# Altium PCB board2.PcbDoc
Units mm, origin at the board's own origin, x right, y up, seen from the top; angles counter-clockwise.
Board outline 14 x 33 mm, 2 copper layers (Component Side, Bottom Layer), stack 0.325 mm thick; 33 components, 30 nets, 186 pads, 59 vias.
Unrouted connection lines stored in the file: 11.
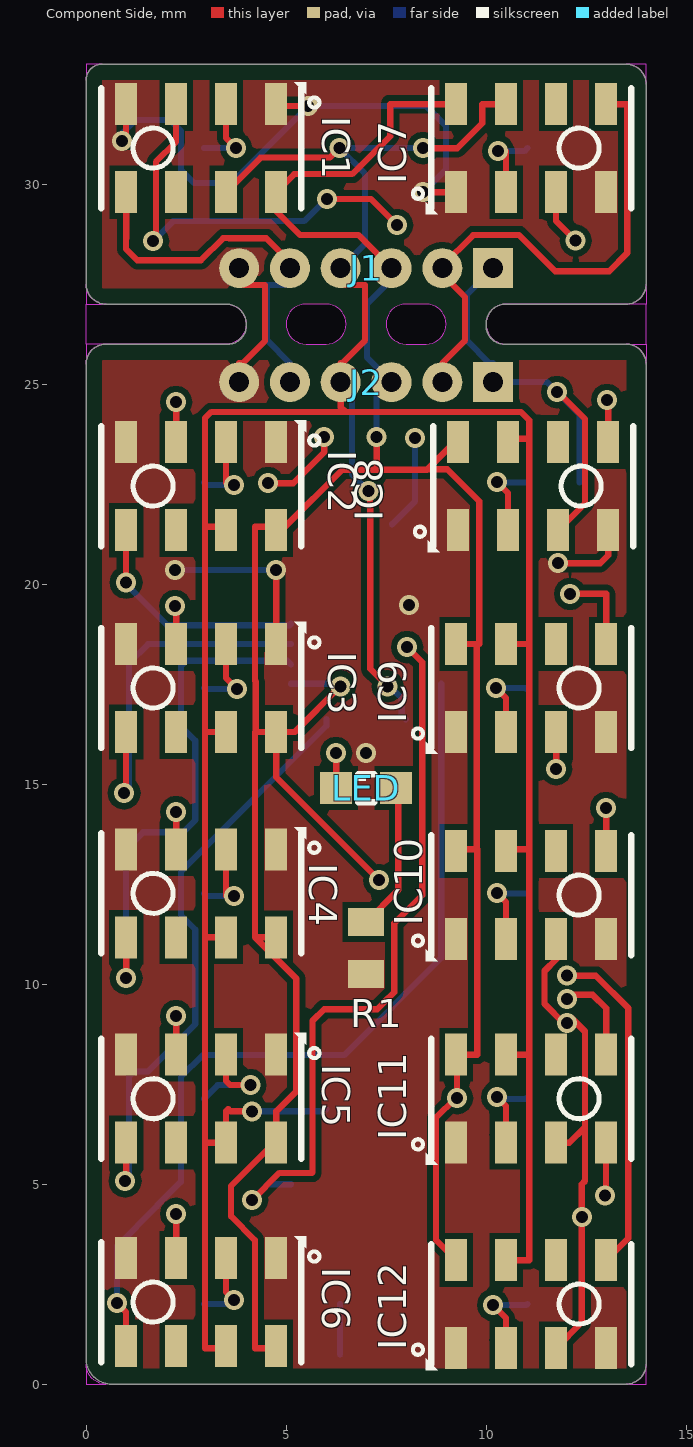
[diagram p0: Component Side view]
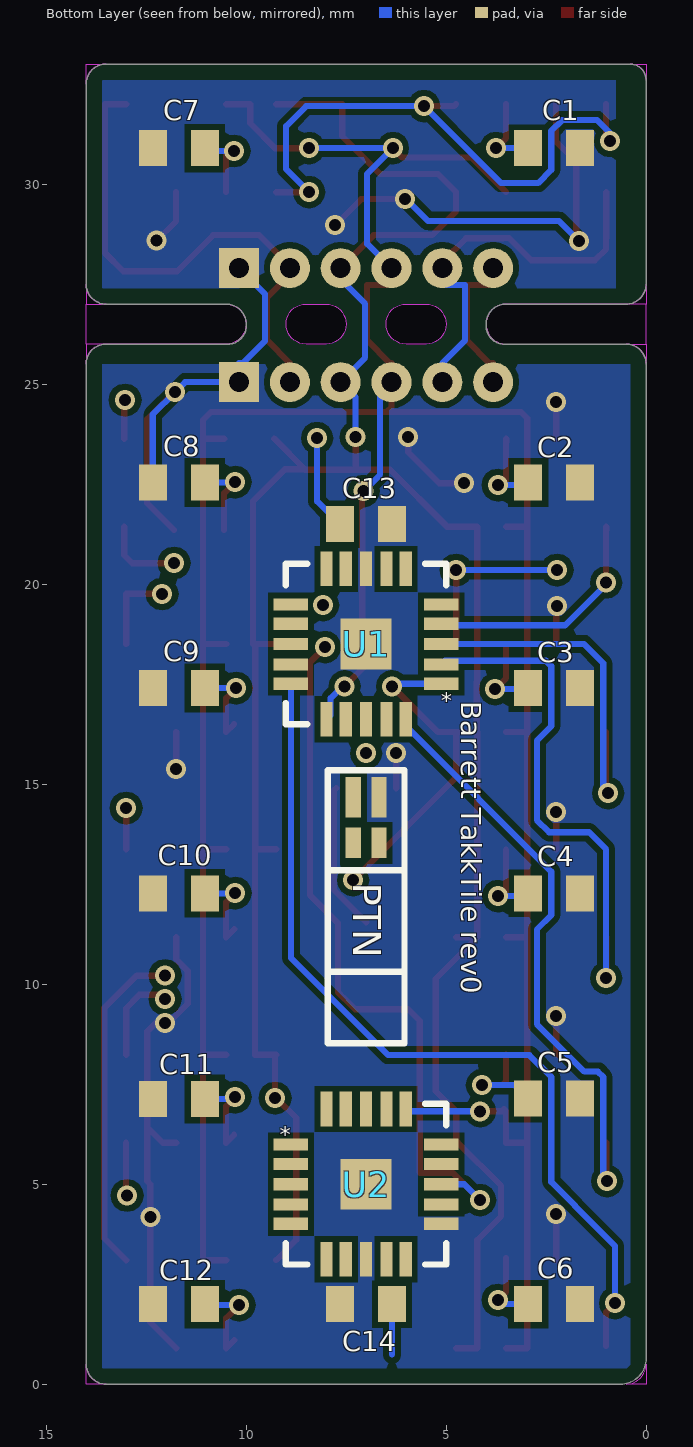
[diagram p1: Bottom Layer view, seen from below]

## Layer stack, top to bottom
Top Solder: solder mask 0.0102, Solder Resist, Dk 3.5
Component Side: signal copper 0.0356
Dielectric 1: core 0.254, FR-4, Dk 4.2
Bottom Layer: signal copper 0.0356
Solder Side: solder mask 0.0102, Solder Resist, Dk 3.5

## Board outline
0,0.637 0,25.5 cw(c0.5,25.5) 0.5,26 3.55,26 ccw(c3.55,26.45) 4,26.45 4,26.5 ccw(c3.5,26.5) 3.5,27 0.5,27 cw(c0.5,27.5) 0,27.5 0,32.6 cw(c0.4,32.6) 0.4,33 13.5,33 cw(c13.5,32.5) 14,32.5 14,27.5 cw(c13.5,27.5) 13.5,27 10.5,27 ccw(c10.5,26.5) 10,26.5 10,26.45 ccw(c10.45,26.45) 10.45,26 13.5,26 cw(c13.5,25.5) 14,25.5 14,0.5 cw(c13.5,0.5) 13.5,0 0.637,0 cw(c0.637,0.637)
cut-out: 14,27 10.5,27 ccw(c10.5,26.5) 10,26.5 ccw(c10.5,26.5) 10.5,26 14,26
cut-out: 0,27 3.5,27 cw(c3.5,26.5) 4,26.5 cw(c3.5,26.5) 3.5,26 0,26
cut-out: 8,27 ccw(c8,26.5) 7.5,26.5 ccw(c8,26.5) 8,26 8.5,26 ccw(c8.5,26.5) 9,26.5 ccw(c8.5,26.5) 8.5,27
cut-out: 5.5,27 ccw(c5.5,26.5) 5,26.5 ccw(c5.5,26.5) 5.5,26 6,26 ccw(c6,26.5) 6.5,26.5 ccw(c6,26.5) 6,27
cut-out: 0,0 0.5,0 cw(c0.5,0.5) 0,0.5
cut-out: 14,0 14,0.5 cw(c13.5,0.5) 13.5,0
cut-out: 14,25.5 ccw(c13.5,25.5) 13.5,26 14,26
cut-out: 13.5,27 ccw(c13.5,27.5) 14,27.5 14,27
cut-out: 13.5,33 cw(c13.5,32.5) 14,32.5 14,33
cut-out: 0,33 0,32.6 cw(c0.4,32.6) 0.4,33
cut-out: 0,27 0.5,27 cw(c0.5,27.5) 0,27.5
cut-out: 0,25.5 cw(c0.5,25.5) 0.5,26 0,26

## Design rules (kind name [scope] priority, off if disabled: settings)
BoardOutlineClearance [All] p1: gap=0.35 except(0.2: Text-OutlineEdge Text-CutoutEdge Text-CavityEdge Text-SplitBarrior Text-SplitContinuation; 0.4: Track-OutlineEdge Track-CutoutEdge Track-CavityEdge Track-SplitBarrior Track-SplitContinuation)
Clearance 0.127 [All] p1: gap=0.153
Clearance "Clearance (Same Net)" [All] p2: gap=0 except(0.127: SMDPad-SMDPad SMDPad-THPad; 0.152: SMDPad-Via)
ComponentClearance [All] p1: gap=0.127 collisioncheckmode=3 verticalgap=0.127 showdistances=FALSE
HoleSize [All] p1: absolutevalues=TRUE maxlimit=2.54 minlimit=0.254 maxpercent=80.000 minpercent=20.000
HoleToHoleClearance mdViaViaSameLayer [All] p1: gap=0.203 allowstackedmicrovias=TRUE
HoleToHoleClearance [All] p2: gap=0.254 allowstackedmicrovias=TRUE
MinimumSolderMaskSliver [All] p1: minsoldermaskwidth=0.025
PasteMaskExpansion mlMinCreamFrame [All] p1: expansion=0
PasteMaskExpansion [All] p2: expansion=0
PlaneConnect [All] p1: planeconnectstyle=Direct reliefexpansion=0.508 reliefentries=4 reliefconductorwidth=0.254 reliefairgap=0.254
PolygonConnect ThermalVias [IsVia] p1: connectstyle=Direct reliefconductorwidth=0.254 reliefentries=4 polygonreliefangle="90 Angle" airgapwidth=0.254
PolygonConnect [All] p2: connectstyle=Direct reliefconductorwidth=0.254 reliefentries=4 polygonreliefangle="90 Angle" airgapwidth=0.254
RoutingVias [All] p1: holewidth=0.3 width=0.5 viastyle="Through Hole" minholewidth=0.3 minwidth=0.5 maxholewidth=0.3 maxwidth=0.5
SilkToSilkClearance [All] p1 off: silktosilkclearance=0.254
SilkToSolderMaskClearance [IsPad] p1 off: minsilkscreentomaskgap=0.254 clearancetoexposedcopper=TRUE
SolderMaskExpansion mlMinStopFrame [All] p1: expansion=0.051
SolderMaskExpansion [All] p2: expansion=0.102
Width Width_1 [All] p1: maxlimit=0.16 minlimit=0.153 preferedwidth=0.153
Width [All] p2: maxlimit=0.254 minlimit=0.254 preferedwidth=0.254
22 further rules are at their usual default settings.

## Classes and differential pairs
component class board: C1 C2 C3 C5 C6 C7 C8 C9 C10 C11 C12 C13 C14 IC1 IC2 IC3 IC4 IC5 IC6 IC7 IC9 IC10 IC11 IC12 J1 J2 LED PTN R1 U1

## Components (designator, comment, footprint, x,y, rotation, side; value= is the part's Value field where it differs from the comment)
C1 "1uF" C0402 2.3,30.9 r180 bottom
C2 "1uF" C0402 2.3,22.539 r180 bottom
C3 "1uF" C0402 2.3,17.404 r180 bottom
C4 "1uF" C0402 2.3,12.269 r180 bottom
C5 "1uF" C0402 2.3,7.135 r180 bottom
C6 "1uF" C0402 2.3,2 r180 bottom
C7 "1uF" C0402 11.683,30.9 r0 bottom
C8 "1uF" C0402 11.683,22.539 r0 bottom
C9 "1uF" C0402 11.683,17.404 r0 bottom
C10 "1uF" C0402 11.683,12.269 r0 bottom
C11 "1uF" C0402NOMECH 11.683,7.127 r0 bottom
C12 "1uF" C0402 11.683,2 r0 bottom
C13 "1uF" C0402 7,21.498 r180 bottom
C14 "1uF" C0402 7,2 r0 bottom
IC1 "MPL115A2" MPL115A2 1.675,30.9 r270 top
IC2 "MPL115A2" MPL115A2 1.675,22.45 r270 top
IC3 "MPL115A2" MPL115A2 1.675,17.404 r270 top
IC4 "MPL115A2" MPL115A2 1.675,12.269 r270 top
IC5 "MPL115A2" MPL115A2 1.675,7.135 r270 top
IC6 "MPL115A2" MPL115A2 1.675,2.05 r270 top
IC7 "MPL115A2" MPL115A2 12.325,30.9 r90 top
IC8 "MPL115A2" MPL115A2 12.375,22.45 r90 top
IC9 "MPL115A2" MPL115A2 12.325,17.404 r90 top
IC10 "MPL115A2" MPL115A2 12.325,12.225 r90 top
IC11 "MPL115A2" MPL115A2 12.325,7.135 r90 top
IC12 "MPL115A2" MPL115A2 12.325,2 r90 top
J1 "CON6THR127" CON6THR127NOSILK 7,27.9 r0 top
J2 "CON6THR127" CON6THR127NOSILK 7,25.05 r0 top
LED "LEDSML0603" SML0603 7,14.9 r0 top
PTN "PTN4H" PTN4H 7,14.1 r180 bottom
R1 "120R" R0402 7,10.9 r270 top
U1 "ATTINY24A-MU-QFN20" QFN50P400X400X80-21N 7,18.5 r0 bottom
U2 "ATTINY24A-MU-QFN20" QFN50P400X400X80-21N 7,4.998 r180 bottom

## Footprints (in the part's own frame and the unit in brackets; to place one, negate y for a bottom-side part, rotate by r counter-clockwise, add the part's x,y. Pads: shape width x height; smd on the part's side, far side on the other; paste and mask are expansions set on the pad)
C0402 [mm] "C0402"
  rect 0.7x0.9 smd: 1(-0.65,0) 2(0.65,0)
C0402NOMECH [mm] "C0402"
  rect 0.7x0.9 smd: 1(-0.65,0) 2(0.65,0)
CON6THR127NOSILK [mm] "Connector, Through Hole, 1.27mm"
  round 1 hole 0.5: 1(-3.175,0) 2(-1.905,0) 3(-0.635,0) 4(0.635,0) 5(1.905,0)
  rect 1x1 hole 0.5: 6(3.175,0)
MPL115A2 [mm] "MPL115A2"
  rect 1.05x0.55 smd: 1(-1.1,3.075) 2(-1.1,1.825) 3(-1.1,0.575) 4(-1.1,-0.675) 5(1.1,-0.675) 6(1.1,0.575) 7(1.1,1.825) 8(1.1,3.075)
  silkscreen extent -1.65,-1.3 1.5,4.16
PTN4H [mm]
  rect 0.38x1.02 smd: 0(-0.32,0.57) 1(0.32,0.57)
  rect 0.38x0.76 smd: 2(-0.32,-0.57) 3(0.32,-0.57)
  silkscreen extent -0.96,-5.58 0.96,1.25
QFN50P400X400X80-21N [mil] "QFN50P400X400X80-21N"
  rect 34x12 smd: 1(-74,39) 2(-74,20) 3(-74,0) 4(-74,-20) 5(-74,-39) 11(74,-39) 12(74,-20) 13(74,0) 14(74,20) 15(74,39)
  rect 12x34 smd: 6(-39,-74) 7(-20,-74) 8(0,-74) 9(20,-74) 10(39,-74) 16(39,74) 17(20,74) 18(0,74) 19(-20,74) 20(-39,74)
  rect 50x50 smd: 21(0,0)
  silkscreen extent -79,-79 79,79
R0402 [mm] "R0402"
  rect 0.7x0.9 smd: 1(-0.65,0) 2(0.65,0)
SML0603 [mil] "SML0603"
  rect 31.5x31.5 smd: A(29.53,0) C(-29.53,0)
  silkscreen extent -10,-14 8,16

## Part data
C1 C2 C3 C4 C5 C6 C7 C8 C9 C10 C11 C12 C13 C14: library part C-EUC0402, "CAPACITOR, European symbol"
LED: "LED   OSRAM: - CHIPLED LG R971, LG N971, LY N971, LG Q971, LY Q971, LO R971, LY R971 LH N974, LH R974 LS Q976, LO Q976, LY Q976 LO Q996 - Hyper CHIPLED LW Q18S LB Q993, LB Q99A, LB R99A - SideLED LS A670, LO A670, LY A670, LG A670, LP A670 LB A673, LV A673, LT A673, LW A673 LH A674 LY A675 LS A676, LA A676, LO A676, LY A676, LW A676 LS A679, LY A679, LG A679 -  Hyper Micro SIDELED® LS Y876, LA Y876, LO Y876, LY Y876 LT Y87S - SmartLED LW L88C, LW L88S LB L89C, LB L89S, LG L890 LS L89K, LO L89K, LY L89K LS L896, LA L896, LO L896, LY L896 - TOPLED LS T670, LO T670, LY T670, LG T670, LP T670 LSG T670, LSP T670, LSY T670, LOP T670, LYG T670 LG T671, LOG T671, LSG T671 LB T673, LV T673, LT T673, LW T673 LH T674 LS T676, LA T676, LO T676, LY T676, LB T676, LH T676, LSB T676, LW T676 LB T67C, LV T67C, LT T67C, LS T67K, LO T67K, LY T67K, LW E67C LS E67B, LA E67B, LO E67B, LY E67B, LB E67C, LV E67C, LT E67C LW T67C LS T679, LY T679, LG T679 LS T770, LO T770, LY T770, LG T770, LP T770 LB T773, LV T773, LT T773, LW T773 LH T774 LS E675, LA E675, LY E675, LS T675 LS T776, LA T776, LO T776, LY T776, LB T776 LHGB T686 LT T68C, LB T68C - Hyper Mini TOPLED® LB M676 - Mini TOPLED Santana® LG M470 LS M47K, LO M47K, LY M47K    Source: http://www.osram.convergy.de   LUXEON: - LUMILED® LXK2-PW12-R00, LXK2-PW12-S00, LXK2-PW14-U00, LXK2-PW14-V00 LXK2-PM12-R00, LXK2-PM12-S00, LXK2-PM14-U00 LXK2-PE12-Q00, LXK2-PE12-R00, LXK2-PE12-S00, LXK2-PE14-T00, LXK2-PE14-U00 LXK2-PB12-K00, LXK2-PB12-L00, LXK2-PB12-M00, LXK2-PB14-N00, LXK2-PB14-P00, LXK2-PB14-Q00 LXK2-PR12-L00, LXK2-PR12-M00, LXK2-PR14-Q00, LXK2-PR14-R00 LXK2-PD12-Q00, LXK2-PD12-R00, LXK2-PD12-S00 LXK2-PH12-R00, LXK2-PH12-S00 LXK2-PL12-P00, LXK2-PL12-Q00, LXK2-PL12-R00    Source: www.luxeon.com   KINGBRIGHT:   KA-3528ASYC Source: www.kingbright.com"
PTN: "Omnetics PTN Connector 4 pins, Horizontal"
R1: library part R-US_R0402, "RESISTOR, American symbol"
U1 U2: library part ATTINY24A-MU, "Microcontroller"

## Via types
v1: diameter 0.5, hole 0.3, Component Side to Bottom Layer, 59 vias

## Nets (pads, with @x,y where several pads share a name; then routed paths per layer and width w, separated by ;. In a path a pad name is that pad's centre, name@x,y a point inside that pad or via, vN(x,y) a via of type N, cw(c..) or ccw(c..) an arc to the next point about the centre after c; other vN are vias at no path point)
GND: C1.2 C2.2 C3.2 C4.2 C5.2 C6.2 C7.2 C8.2 C9.2 C10.2 C11.2 C12.2 C13.2 C14.2 IC1.3 IC2.3 IC3.3 IC4.3 IC5.3 IC6.3 IC7.3 IC8.3 IC9.3 IC10.3 IC11.3 IC12.3 J1.6 J2.6 LED.C PTN.1 U1.8 U1.21 U2.8 U2.11 U2.21 | length 45.5
  Component Side w0.153: v1(1.675,28.575) 1.746,28.646 1.746,30.554 2.25,31.059 IC1.3 ; v1(6.025,29.625) 7.125,29.625 v1(7.775,28.975) ; J2.6 J2.6@10.479,25.354 ; IC7.3 11.75,29.075 v1(12.241,28.584) ; v1(11.775,24.8) 11.801,24.8 12.476,24.125 12.476,22.026 IC8.3
  Component Side w0.16: v1(2.225,19.45) 2.25,19.425 IC3.3 ; IC6.3@2.25,3.1 v1@2.25,4.025 ; IC5.3 v1(2.25,9.2) ; IC4.3 v1(2.25,14.301) ; IC2.3@2.25,23.639 v1(2.25,24.55) ; v1(4.55,22.525) 5.175,22.525 5.95,23.3 v1(5.95,23.675) ; LED.C v1@6.25,15.725 ; J1.6@9.746,27.7 J1.6@10.14,27.7 ; IC12.3 12.394,1.544 v1(12.394,4.175) 12.394,5 12.471,5.077 12.471,6.425 ; IC11.3 12.081,6.035 12.471,6.425 ; IC10.3@11.75,11.169 11.75,10.62 11.46,10.33 11.46,9.509 11.943,9.025 v1(12.026,9.025) ; v1@11.75,15.376 IC9.3 ; v1@12.146,9.143 12.471,8.818 12.471,6.425 ; v1@2.25,4.025 v1(2.25,4.258) v1@2.25,4.025
  Bottom Layer w0.153: v1(1.675,28.575) 2.175,29.075 5.45,29.075 6,29.625 v1(6.025,29.625) ; J1.6 9.524,27.249 9.524,26.079 10.079,25.523 10.175,25.523 J2.6 11.525,25.05 v1(11.775,24.8) 12.333,24.242 C8.2
  other v1: 11.751,15.376 6.25,15.775
NetC1_1: C1.1 IC1.2 | length 2
  Component Side w0.153: IC1.2 3.5,31.15 v1(3.75,30.9)
  Bottom Layer w0.153: C1.1 v1(3.75,30.9)
NetC2_1: C2.1 IC2.2 | length 2.1
  Component Side w0.153: IC2.2 3.5,22.529 3.553,22.476 v1(3.7,22.476)
  Component Side w0.16: IC2.2 IC2.2@3.5,23.639
  Bottom Layer w0.153: C2.1 3.013,22.476 v1(3.7,22.476)
NetC3_1: C3.1 IC3.2 | length 2.1
  Component Side w0.153: IC3.2 3.5,17.65 v1(3.775,17.375)
  Bottom Layer w0.153: C3.1 2.979,17.375 v1(3.775,17.375)
NetC4_1: C4.1 IC4.2 | length 2.1
  Component Side w0.153: IC4.2 3.5,12.2 v1(3.7,12.201)
  Bottom Layer w0.153: C4.1 3.019,12.201 v1(3.7,12.201)
NetC5_1: C5.1 IC5.2 | length 2.6
  Component Side w0.153: IC5.2 3.5,7.575 3.601,7.474 v1(4.108,7.474)
  Bottom Layer w0.153: C5.1 3.289,7.474 v1(4.108,7.474)
NetC6_1: C6.1 IC6.2 | length 1.9
  Component Side w0.153: IC6.2 3.5,2.3 v1(3.7,2.1)
  Bottom Layer w0.153: C6.1 3.6,2 v1(3.7,2.1)
NetC7_1: C7.1 IC7.2 | length 2
  Component Side w0.153: v1(10.301,30.827) 10.498,30.827 10.5,30.825 IC7.2
  Bottom Layer w0.153: v1(10.301,30.827) 10.96,30.827 C7.1
NetC8_1: C8.1 IC8.2 | length 2.1
  Component Side w0.153: v1(10.275,22.55) 10.55,22.275 IC8.2
  Bottom Layer w0.153: v1(10.275,22.55) 10.286,22.539 C8.1 C8.1@11.022,22.55
NetC9_1: C9.1 IC9.2 | length 2.3
  Component Side w0.153: v1(10.25,17.4) 10.5,17.15 IC9.2 IC9.2@10.301,16.503
  Bottom Layer w0.153: v1(10.25,17.4) 10.254,17.404 C9.1 C9.1@11.005,17.376
NetC10_1: C10.1 IC10.2 | length 2.3
  Component Side w0.153: v1(10.275,12.275) 10.5,12.05 IC10.2@10.5,11.169
  Component Side w0.16: IC10.2@10.3,11.369 IC10.2@10.5,11.169
  Bottom Layer w0.153: v1(10.275,12.275) 10.281,12.269 C10.1 C10.1@11.027,12.276
NetC11_1: C11.1 IC11.2 | length 2.3
  Component Side w0.153: v1(10.276,7.175) 10.5,6.951 IC11.2 IC11.2@10.301,6.234
  Bottom Layer w0.153: v1(10.276,7.175) 10.324,7.127 C11.1 C11.1@11.01,7.15
NetC12_1: C12.1 IC12.2 | length 2.4
  Component Side w0.153: v1(10.175,1.975) 10.5,1.65 IC12.2
  Component Side w0.16: IC12.2@10.3,1.099 IC12.2
  Bottom Layer w0.153: v1(10.175,1.975) 11.008,1.975 C12.1
NetLED_A: LED.A R1.1 | length 3.7
  Component Side w0.16: R1.1 7.808,12.358 7.808,14.842 LED.A
RESET: U1.13 U2.13 | length 18.1
  Component Side w0.153: v1(4.15,4.6) 4.83,5.28 5.648,5.28 5.659,5.291
  Component Side w0.16: 5.659,5.291 5.659,9.084 5.95,9.375 7.275,9.375 7.546,9.646 7.555,9.646 7.704,9.795 7.704,11.525 8.404,12.225 8.404,18.046 v1(8.025,18.425)
  Bottom Layer w0.153: v1(4.15,4.6) 4.548,4.998 U2.13
RST01: IC1.5 J1.2 J2.2 U1.5 | length 10.4
  Component Side w0.153: 1,28.65 1,28.375 1.28,28.096 2.87,28.096 3.425,28.65 3.575,28.65 ; 4.5,28.65 5.095,28.055 J1.2
  Component Side w0.16: 1,28.65 IC1.5 ; 3.575,28.65 4.5,28.65 ; J1.2@4.746,27.7 5.06,27.7 J1.2@5.06,27.9
  Bottom Layer w0.153: J2.2 5.095,25.524 4.524,26.096 4.524,27.476 5.095,27.476 J1.2
RST01_2: IC7.5 J1.5 J2.5 U2.5 | length 13.1
  Component Side w0.153: J2.5 8.905,25.524 9.476,26.096 9.476,27.174 8.905,27.745 J1.5 8.905,27.955 9.675,28.725 10.825,28.725 11.725,27.825
  Component Side w0.16: 11.725,27.825 13.075,27.825 13.529,28.279 13.529,32 IC7.5
RST02: IC2.5 U1.4 | length 6
  Component Side w0.153: v1(1,20.039) IC2.5
  Component Side w0.16: IC2.5 IC2.5@1,21.439
  Bottom Layer w0.153: v1(1,20.039) 1,19.997 2.026,18.971 5.083,18.971 U1.4
RST02_2: IC8.5 U2.4 | length 1
  Component Side w0.16: v1(13.025,24.6) 13.05,24.575 IC8.5@13.05,23.639
RST03: IC3.5 U1.3 | length 9.1
  Component Side w0.153: v1(0.95,14.775) 1,14.825 IC3.5
  Bottom Layer w0.153: v1(0.95,14.775) 1.071,14.895 1.071,18.02 1.55,18.5 U1.3
RST03_2: IC9.5 U2.3 | length 2.2
  Component Side w0.16: v1(12.1,19.756) 12.101,19.755 13,19.755 IC9.5
RST04: IC4.5 U1.2 | length 13.1
  Component Side w0.16: v1(1,10.15) IC4.5
  Bottom Layer w0.153: v1(1,10.15) 1,13.369 1.427,13.796 2.426,13.796 2.73,14.1 2.73,16.09 2.37,16.449 2.37,17.949 2.505,18.083 5.029,18.083 U1.2
RST04_2: IC10.5 U2.2 | length 1
  Component Side w0.16: IC10.5@13,13.369 v1(13,14.4)
RST05: IC5.5 U1.20 | length 15.1
  Component Side w0.16: v1(0.975,5.075) 1,5.1 IC5.5
  Bottom Layer w0.153: v1(0.975,5.075) 1.071,5.171 1.071,7.68 1.205,7.814 1.542,7.814 2.73,9.001 2.73,11.365 2.37,11.724 2.37,12.814 6.009,16.453 U1.20
RST05_2: IC11.5 U2.20 | length 2.4
  Component Side w0.16: v1@12.025,9.73 12.67,9.73 13,9.4 IC11.5 ; v1(12.026,9.625) v1@12.026,9.729
RST06: IC6.5 U1.15 | length 22.1
  Component Side w0.153: v1(0.775,2.025) 1,1.8 IC6.5
  Bottom Layer w0.153: v1(0.775,2.025) 0.775,3.45 1.771,4.446 1.771,4.457 2.37,5.057 2.37,7.68 2.918,8.227 6.45,8.227 8.88,10.657 U1.15
RST06_2: IC12.5 U2.15 | length 8.4
  Component Side w0.16: v1(12.025,10.213) 12.741,10.213 13.55,9.404 13.55,3.65 IC12.5
SCL: IC1.8 IC2.8 IC3.8 IC4.8 IC5.8 IC6.8 IC7.8 IC8.8 IC9.8 IC10.8 IC11.8 IC12.8 J1.4 J2.4 PTN.2 U1.1 U2.1 | length 75.9
  Component Side w0.153: 4.221,3.6 3.625,4.196 3.625,4.955 4.705,6.035 IC5.8 ; 7.6,31.2 6.65,30.25 5.2,30.25 IC1.8 4.75,29.325 5.35,28.725 6.81,28.725 J1.4 ; IC12.8 8.746,3.605 8.746,6.655 9.241,7.15 v1(9.275,7.15) 9.275,8.21 IC11.8
  Component Side w0.16: 4.221,3.6 4.221,0.9 IC6.8@4.75,0.9 ; IC5.8 4.75,6.817 5.258,7.325 5.258,10.132 4.221,11.169 ; IC4.8 4.221,11.169 ; v1(6.354,17.445) 5.212,16.304 IC3.8 ; v1(7.262,23.675) 7.262,22.86 ; v1(7.325,12.6) 4.75,15.175 IC3.8 ; 7.6,31.2 7.6,32 IC7.8 ; IC11.8 9.779,8.235 9.779,13.369 ; IC10.8@9.25,13.369 9.779,13.369 ; IC9.8 9.779,18.504 ; IC8.8@9.3,23.639 8.536,22.875 ; 4.221,11.169 4.221,16.304 ; 4.221,16.304 4.237,16.32 4.237,17.566 4.221,17.582 4.221,21.439 4.979,21.439 6.4,22.86 7.262,22.86 ; 4.221,16.304 IC3.8 ; 7.262,22.86 8.521,22.86 8.536,22.875 ; 8.536,22.875 9.029,22.875 9.829,22.075 9.829,18.504 9.779,18.504 ; 9.779,13.369 9.767,13.382 9.767,18.492 9.779,18.504
  Bottom Layer w0.153: U1.1 6.29,17.509 v1(6.354,17.445) ; v1(7.262,23.675) 7.262,24.677 J2.4 7.024,25.662 7.024,27.006 7.635,27.617 J1.4
SDA: IC1.7 IC2.7 IC3.7 IC4.7 IC5.7 IC6.7 IC7.7 IC8.7 IC9.7 IC10.7 IC11.7 IC12.7 J1.3 J2.3 PTN.3 U1.16 U2.16 | length 86.7
  Component Side w0.153: 2.971,23.65 2.971,24.146 3.13,24.305 6.485,24.305 ; IC5.7 3.5,6.825 3.553,6.878 3.609,6.821 v1(4.147,6.821) ; IC1.7 4.363,30.662 6.092,30.662 v1(6.33,30.9) ; 6.365,24.425 6.485,24.305 ; J2.3 6.365,25.523 6.404,25.523 6.976,26.096 6.976,27.476 6.365,27.476 J1.3 ; v1(7.061,22.325) 7.1,22.286 7.1,21.875 ; 11.079,23.639 11.079,24.096 10.87,24.305 6.485,24.305
  Component Side w0.16: 2.971,23.65 2.971,21.439 ; IC6.7@3.5,0.9 2.971,0.9 2.971,6.035 ; IC5.7 2.971,6.035 ; IC4.7 2.971,11.169 ; IC3.7 2.971,16.304 ; IC2.7@3.5,21.439 2.971,21.439 ; 6.365,24.425 J2.3 ; 7.1,21.875 7.1,17.883 v1(7.538,17.445) ; v1(8.425,30.9) 9.28,30.9 9.9,31.52 9.9,32 IC7.7 ; IC12.7 11.079,3.1 11.079,8.235 ; IC11.7 11.079,8.235 ; IC10.7@10.5,13.369 11.079,13.369 ; IC9.7 11.079,18.504 ; IC8.7@10.55,23.639 11.079,23.639 11.079,18.504 ; 2.971,6.035 2.971,11.169 ; 2.971,11.169 2.971,16.304 ; 2.971,16.304 2.971,21.439 ; 11.079,8.235 11.079,13.369 ; 11.079,13.369 11.079,18.504
  Bottom Layer w0.153: v1(4.147,6.821) 5.953,6.821 U2.16 ; J2.3 6.65,24.765 6.65,22.736 v1(7.061,22.325) ; J1.3 6.975,28.51 6.975,30.255 v1(6.33,30.9) v1(8.425,30.9) ; v1(7.538,17.445) 7.592,17.445 7.89,17.147 7.89,16.721 U1.16
VCC: C13.1 C14.1 IC1.1 IC1.4 IC2.1 IC2.4 IC3.1 IC3.4 IC4.1 IC4.4 IC5.1 IC5.4 IC6.1 IC6.4 IC7.1 IC7.4 IC8.1 IC8.4 IC9.1 IC9.4 IC10.1 IC10.4 IC11.1 IC11.4 IC12.1 IC12.4 J1.1 J2.1 PTN.0 R1.2 U1.9 U2.9 | length 30.4
  Component Side w0.153: v1(0.9,31.077) 0.999,31.077 1,31.075 IC1.4 ; J2.1 3.825,25.523 3.921,25.523 4.476,26.079 4.476,27.476 3.825,27.476 J1.1 ; IC1.1 4.8,31.95 v1(5.55,31.95) ; v1(12.976,4.714) 13,4.739 IC11.4
  Component Side w0.16: IC3.1 v1(4.75,20.35) ; v1(8.425,29.8) IC7.1 ; v1(11.8,20.525) 12.85,20.525 13.05,20.725 IC8.4@13.05,21.439
  Bottom Layer w0.153: v1(0.9,31.077) 0.9,31.274 1.226,31.6 2.102,31.6 2.37,31.331 2.37,30.355 2.7,30.025 3.625,30.025 v1(5.55,31.95) 8.5,31.95 9,31.45 9,30.375 v1(8.425,29.8) ; v1(2.225,20.35) v1(4.75,20.35) ; 6.35,0.739 C14.1 ; C13.1 8.225,22.073 v1(8.225,23.65)
  other v1: 7,15.775 8.075,19.475
pads on no net: IC1.6 IC2.6 IC3.6 IC4.6 IC5.6 IC6.6 IC7.6 IC8.6 IC9.6 IC10.6 IC11.6 IC12.6 U1.6 U1.7 U1.10 U1.11 U1.12 U1.14 U1.17 U1.18 U1.19 U2.6 U2.7 U2.10 U2.12 U2.14 U2.17 U2.18 U2.19

## Polygon pours and split planes (outlines as drawn)
VCC on Component Side "VCC_Plane2" (solid, pour order 16): 0.4,25.6 13.5,25.6 13.5,0.4 7.1,0.4 0.4,0.4
VCC on Component Side "VCC_Plane1" (solid, pour order 8): 0.4,32.6 0.4,27.4 13.6,27.4 13.6,32.6
GND on Bottom Layer "GND_Plane2" (solid, pour order 18): 0.763,32.6 13.6,32.6 13.6,27.4 0.763,27.4
GND on Bottom Layer "GND_Plane" (solid, pour order 10): 0.4,25.5 0.4,0.4 13.6,0.4 13.6,25.5

## Silkscreen, mask and mechanical layers (free items; w line width, h text height)
Bottom Overlay:
  text "Barrett TakkTile rev0" at 4.625,17.075 h0.5 r90
Mechanical 1:
  lines w0.1: 0,0.637 ccw(c0.637,0.637) 0.637,0 ; 0,25.5 cw(c0.5,25.5) 0.5,26 ; 0,27.5 ccw(c0.5,27.5) 0.5,27 ; 0,32.6 cw(c0.4,32.6) 0.4,33 ; 3.5,27 cw(c3.5,26.5) 4,26.5 ; 3.55,26 ccw(c3.55,26.45) 4,26.45 ; 10,26.45 ccw(c10.45,26.45) 10.45,26 ; 10,26.5 cw(c10.5,26.5) 10.5,27 ; 13.5,0 ccw(c13.5,0.5) 14,0.5 ; 13.5,26 cw(c13.5,25.5) 14,25.5 ; 13.5,27 ccw(c13.5,27.5) 14,27.5 ; 13.5,33 cw(c13.5,32.5) 14,32.5
  lines w0.16: 0,0.637 0,25.363 0,25.5 ; 0,27.5 0,32.6 ; 0.4,33 13.363,33 13.5,33 ; 0.5,26 3.55,26 ; 0.5,27 3.5,27 ; 0.637,0 13.5,0 ; 4,26.45 4,26.5 ; 10,26.45 10,26.5 ; 10.45,26 13.5,26 ; 10.5,27 13.5,27 ; 14,0.5 14,0.637 14,25.5 ; 14,27.5 14,32.5

## Text inside footprints (layer, text, board x,y; h text height)
U1: Bottom Overlay "*" at 4.841,17.611 h0.7 r180
U2: Bottom Overlay "*" at 9.159,5.887 h0.7; FabNotes "*" at 10.505,5.989 h0.7